# Altium PCB 1819D_Emetteur_DCF.PcbDoc
Units mm, origin at the board's own origin, x right, y up, seen from the top; angles counter-clockwise.
Board outline 44.96 x 35.05 mm, 2 copper layers (Top Layer, Bottom Layer), stack 1.586 mm thick; 35 components, 17 nets, 76 pads, 95 vias.
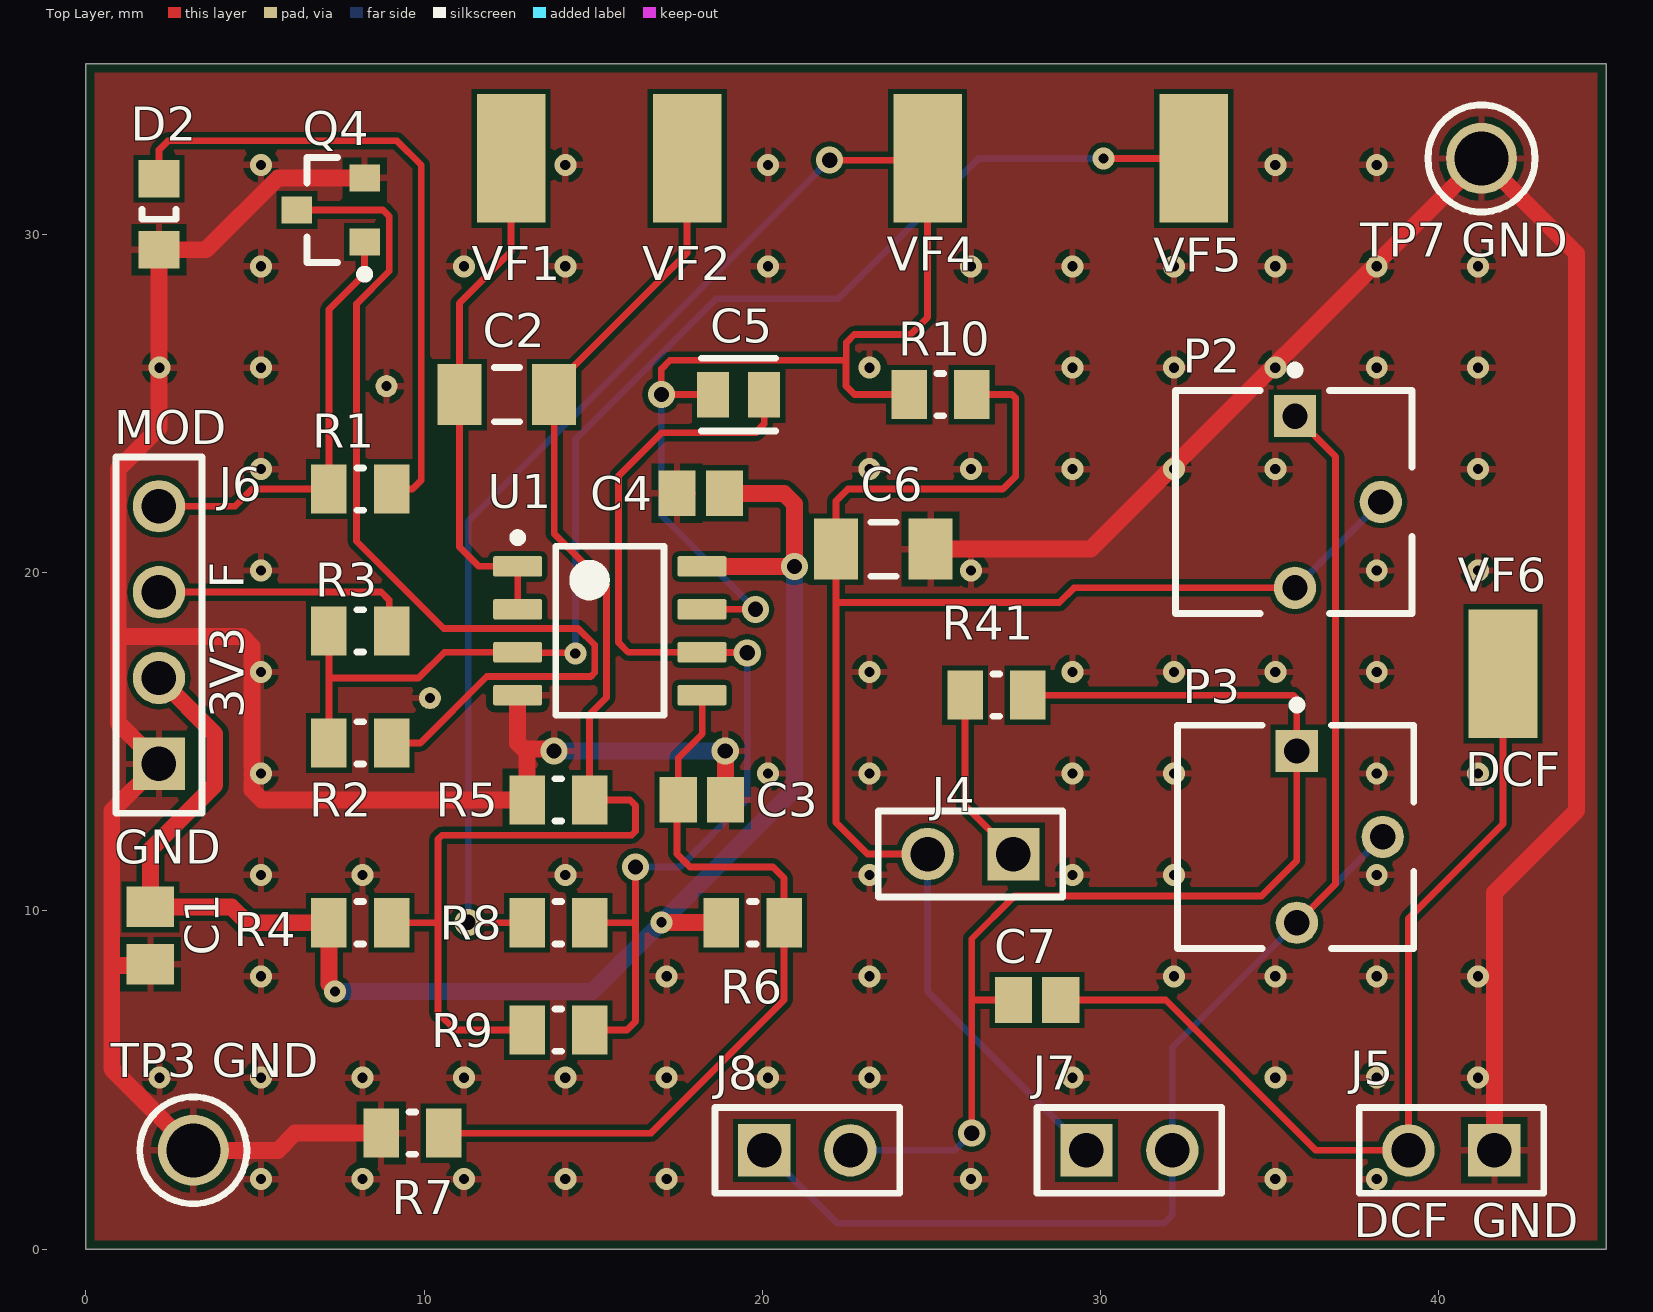
[diagram p0: Top Layer view]
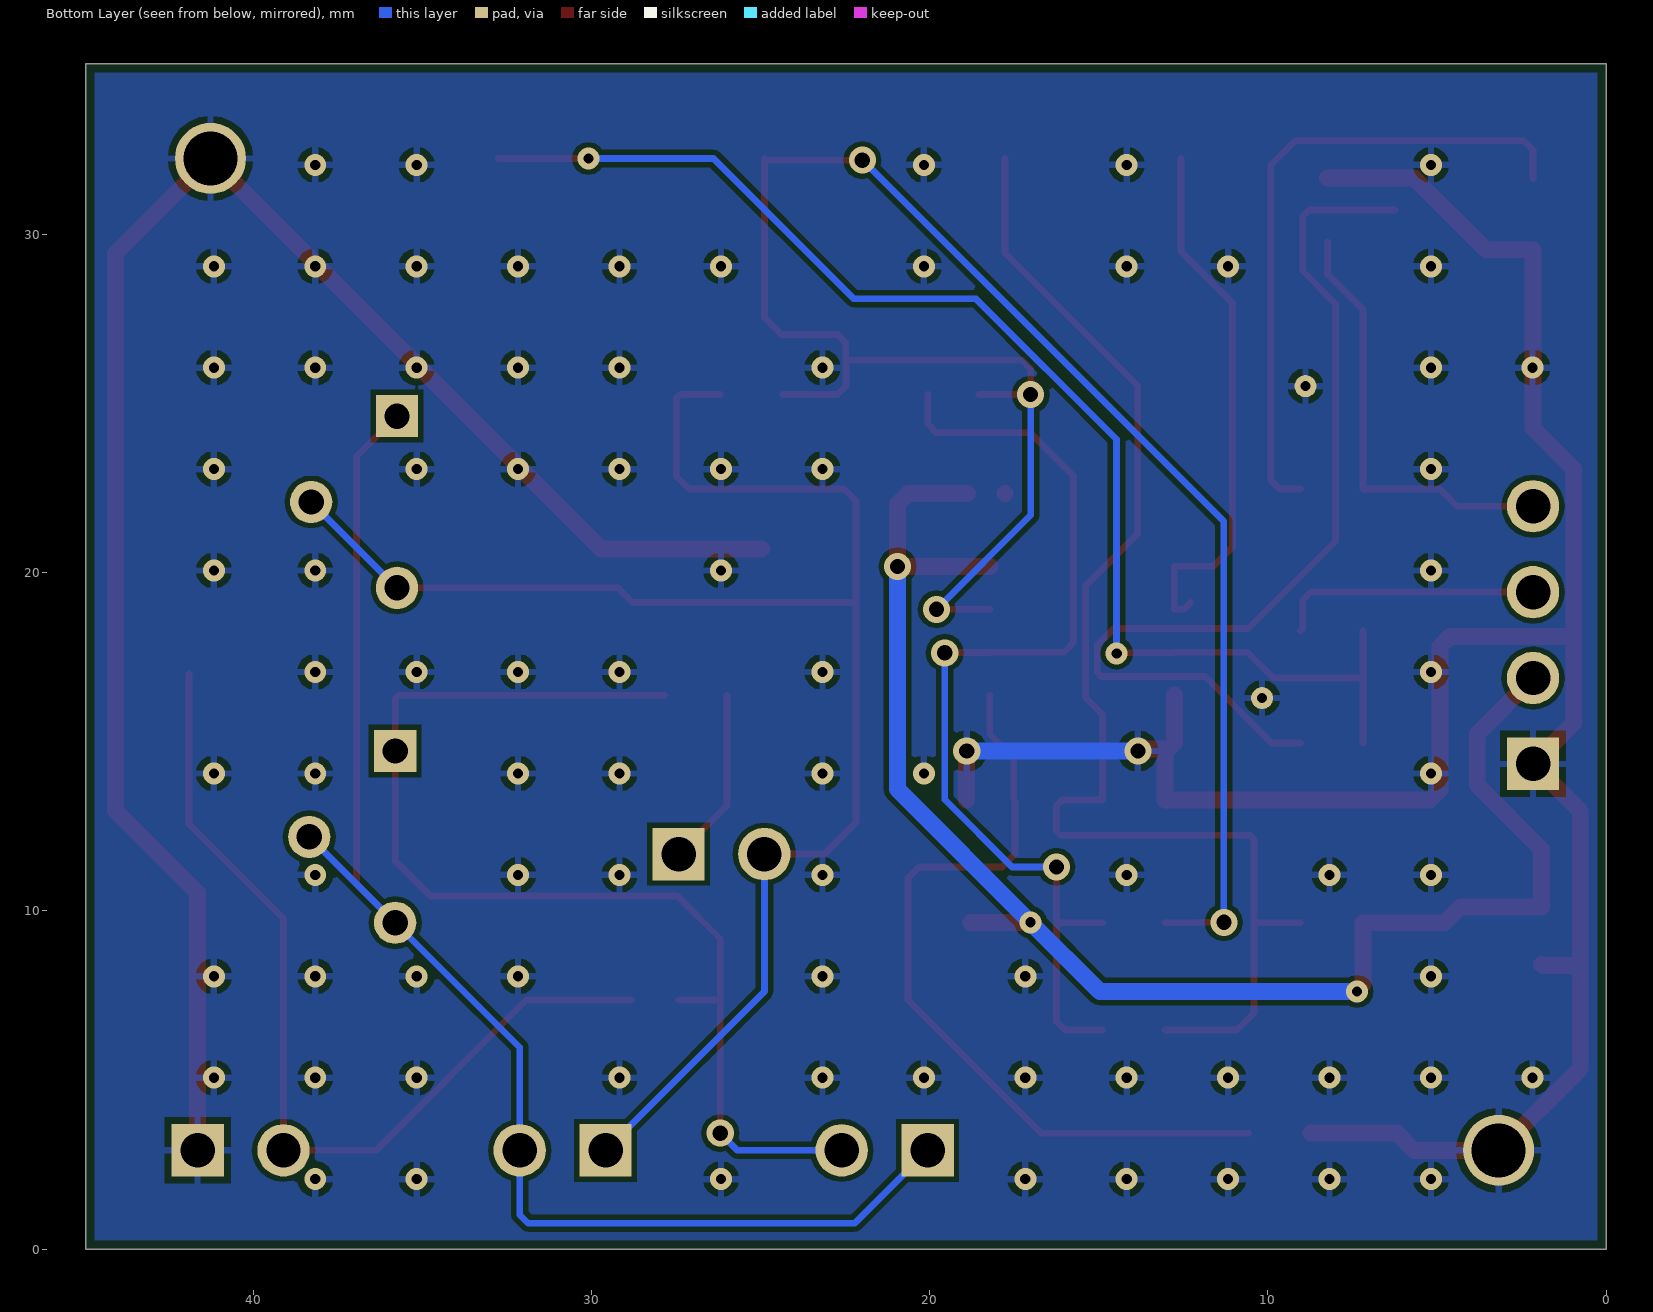
[diagram p1: Bottom Layer view, seen from below]

## Layer stack, top to bottom
Top Solder: solder mask 0.0102, Solder Resist, Dk 3.5
Top Layer: signal copper 0.018
Dielectric1: core 1.55, FR-4, Dk 4.8
Bottom Layer: signal copper 0.018
Bottom Solder: solder mask 0.0102, Solder Resist, Dk 3.5

## Board outline
0,0 44.958,0 44.958,35.052 0,35.052

## Design rules (kind name [scope] priority, off if disabled: settings)
BoardOutlineClearance [All] p1: gap=0.25 ignorepadtopadclearanceinfootprint=FALSE except(0: Arc-SplitContinuation Track-SplitContinuation SMDPad-SplitContinuation THPad-SplitContinuation Via-SplitContinuation Fill-SplitContinuation Poly-SplitContinuation Region-SplitContinuation Text-SplitContinuation)
Clearance Clearance-xPP-xTP-xTT [All] p1: gap=0.15 ignorepadtopadclearanceinfootprint=FALSE except(0: Arc-Hole Track-Hole SMDPad-Hole THPad-Hole Via-Hole Fill-Hole Poly-Hole Region-Hole Text-Hole)
ComponentClearance [All] p1: gap=0.25 collisioncheckmode=3 verticalgap=0.25 showdistances=FALSE
DiffPairsRouting [All] p1: maxlimit=0.25 minlimit=0.25 mostfreqgap=0.25 toplayer_minwidth=0.381 toplayer_maxwidth=0.381 toplayer_prefwidth=0.381 bottomlayer_minwidth=0.381 bottomlayer_maxwidth=0.381 bottomlayer_prefwidth=0.381 maxuncoupledlength=12.5
Height [All] p1: minheight=0 maxheight=25 prefheight=12.5
HoleSize HoleSize-PTH [All] p1: absolutevalues=TRUE maxlimit=10 minlimit=0.25 maxpercent=80.000 minpercent=20.000
HoleToHoleClearance [All] p1: gap=0.35 allowstackedmicrovias=TRUE
MinimumAnnularRing "Minimum IAR  >0.45mm" [((ObjectKind = 'Pad') OR (ObjectKind = 'Via')) And (Layer = 'MultiLayer') And (HoleDiameter > AsMM(0.45))] p1: minimumring=0.175 // minimum inner annular ring for pads > 0.45mm finished hole size
MinimumAnnularRing "Minimum IAR <=0.45mm" [((ObjectKind = 'Pad') OR (ObjectKind = 'Via')) And (Layer = 'MultiLayer') And (HoleDiameter <= AsMM(0.45))] p2: minimumring=0.175 // minimum inner annular ring for pads <= 0.45mm finished hole size
MinimumSolderMaskSliver [All] p1: minsoldermaskwidth=0.08
PasteMaskExpansion [All] p1: expansion=-0.025
PlaneClearance PlaneClearance-IPI [All] p1: clearance=0.25
PlaneConnect [All] p1: planeconnectstyle=Relief reliefexpansion=0.175 reliefentries=4 reliefconductorwidth=0.2 reliefairgap=0.2
PolygonConnect PolygonConnect-xTW [All] p1: connectstyle=Relief reliefconductorwidth=0.2 reliefentries=4 polygonreliefangle="90 Angle" airgapwidth=0.2
RoomDefinition 1819D_Emetteur_DCF [InComponentClass('1819D_Emetteur_DCF')] p1: confinementstyle=ConfineIn formatcopy=TRUE lockcomponents=FALSE outline -5.08,-7.62 50.8,-7.62 50.8,37.846 -5.08,37.846
RoutingCorners [All] p1: cornerstyle=45-Degree minsetback=2.5 maxsetback=2.5
RoutingVias RoutingViasES [All] p1: holewidth=0.3 width=0.65 viastyle="Through Hole" minholewidth=0.25 minwidth=0.61 maxholewidth=0.45 maxwidth=0.8 // finishet hole size <= 0.45mm
SilkToSilkClearance [All] p1: silktosilkclearance=0.2
SilkToSolderMaskClearance SilkscreenOverComponentPads [IsPad] p1: minsilkscreentomaskgap=0.2 clearancetoexposedcopper=TRUE
SolderMaskExpansion [All] p1: expansion=0 istentingtop=FALSE
UnRoutedNet [All] p1: checkbadconnections=TRUE
Width Width-xTW [All] p1: maxlimit=0.5 minlimit=0.2 preferedwidth=0.2 minimp=50.000000 maximp=50.000000 favimp=50.000000
17 further rules are at their usual default settings.

## Components (designator, comment, footprint, x,y, rotation, side; value= is the part's Value field where it differs from the comment)
C1 "10uF" CAPC2013X135X45NL10T25 1.905,9.271 r90 top
C2 "33n" FP-C1206C-EB-IPC_B 12.446,25.273 r0 top value="33,000 pF"
C3 "100nF" CAPC2013X140X50LL20T25 18.219,13.286 r180 top
C4 "100nF" CAPC2013X140X50LL20T25 18.184,22.352 r0 top
C5 "100pF" FP-C0805C-DN-MFG 19.3,25.273 r180 top value="100 pF"
C6 "33n" FP-C1206C-EB-IPC_B 23.582,20.701 r180 top value="33,000 pF"
C7 "100nF" CAPC2013X140X50LL20T25 28.132,7.366 r180 top
D2 "LGR971-KN-1" LED_0805 2.159,30.607 r90 top
J4 "TSW-102-26-L-S" SMTC-TSW-102-26-XX-S 27.432,11.684 r180 top
J5 "TSW-102-26-L-S" SMTC-TSW-102-26-XX-S 41.656,2.921 r180 top
J6 "TSW-104-08-G-S" SMTC-TSW-104-08-X-S 2.159,14.351 r90 top
J7 "TSW-102-26-L-S" SMTC-TSW-102-26-XX-S 29.591,2.921 r0 top
J8 "TSW-102-26-L-S" SMTC-TSW-102-26-XX-S 20.066,2.921 r0 top
P2 "10k" BOUR-3362P 35.722,22.098 r270 top
P3 "100k" BOUR-3362P 35.779,12.192 r270 top
Q4 "IRLML2402TRPBF" INTR-IRLML2402TRPBF-3_V 7.239,30.734 r180 top
R1 "180" RESC2013X50X30NL20T20 8.112,22.479 r0 top
R2 "10k" RESC2013X50X30NL20T20 8.112,14.969 r0 top
R3 "30k" RESC2013X50X30NL20T20 8.112,18.288 r180 top
R4 "10k" RESC2013X50X30NL20T20 8.112,9.652 r0 top
R5 "10k" RESC2013X50X30NL20T20 13.97,13.286 r180 top
R6 "10k" RESC2013X50X30NL20T20 19.721,9.652 r180 top
R7 "10k" RESC2013X50X30NL20T20 9.652,3.429 r0 top
R8 "10k" RESC2013X50X30NL20T20 13.97,9.652 r180 top
R9 "10k" RESC2013X50X30NL20T20 13.97,6.477 r0 top
R10 "47" RESC2013X50X30NL20T20 25.273,25.273 r0 top
R41 "1k" RESC2013X50X30NL20T20 26.924,16.383 r0 top
"TP3 GND" "5011" KSTN-5011_V 3.175,2.921 r90 top
"TP7 GND" "5011" KSTN-5011_V 41.275,32.258 r90 top
U1 "LM6132A" D0008A_N 15.494,18.288 r0 top
VF1 "5019" KSTN-5019_V 12.573,32.258 r90 top
VF2 "5019" KSTN-5019_V 17.78,32.258 r270 top
VF4 "5019" KSTN-5019_V 24.892,32.258 r270 top
VF5 "5019" KSTN-5019_V 32.766,32.258 r90 top
VF6 "5019" KSTN-5019_V 41.91,17.018 r90 top

## Footprints (in the part's own frame and the unit in brackets; to place one, negate y for a bottom-side part, rotate by r counter-clockwise, add the part's x,y. Pads: shape width x height; smd on the part's side, far side on the other; paste and mask are expansions set on the pad)
BOUR-3362P [mm] "THD, 3-Leads, Body 6.6x6.99mm, Pitch 2.54mm"
  rect 1.25x1.25 hole 0.75: 1(-2.54,0.035)
  round 1.25 hole 0.75: 2(0,2.575) 3(2.54,0.035)
  silkscreen extent -4.02,-3.49 3.3,3.49, body extent -3.3,-3.49 3.3,3.49, height 4.95
CAPC2013X135X45NL10T25 [mm] "Chip Capacitor, 2-Leads, Body 2.00x1.25mm, IPC Medium Density"
  rect 1.2x1.4 smd: 1(-0.85,0) 2(0.85,0)
  body extent -1.05,-0.67 1.05,0.67, height 1.35
CAPC2013X140X50LL20T25 [mm] "Chip Capacitor, 2-Leads, Body 2.00x1.25mm, IPC High Density"
  rect 1.1x1.35 smd: 1(-0.7,0) 2(0.7,0)
  body extent -1.1,-0.72 1.1,0.72, height 1.4
D0008A_N [mm] "SOIC, 8-Leads, Body 5x4mm, Pitch 1.27mm, IPC Medium Density"
  rrect17% 1.45x0.6 smd: 1(-2.725,1.905) 2(-2.725,0.635) 3(-2.725,-0.635) 4(-2.725,-1.905) 5(2.725,-1.905) 6(2.725,-0.635) 7(2.725,0.635) 8(2.725,1.905)
  silkscreen extent -2.85,-2.5 1.6,2.88, body extent -3,-2.45 3,2.45, height 1.63
FP-C0805C-DN-MFG [mm]
  rect 0.95x1.35 smd: 1(-0.75,0) 2(0.75,0)
  silkscreen extent -1.1,-1.07 1.1,1.08, body extent -1.4,-0.85 1.4,0.85, height 0.25
FP-C1206C-EB-IPC_B [mm]
  rect 1.305x1.806 smd: 1(-1.401,0) 2(1.401,0)
  silkscreen extent -0.37,-0.8 0.37,0.8, body extent -2.3,-1.15 2.3,1.15, height 0.25
INTR-IRLML2402TRPBF-3_V [mm] "SOT23, 3-Leads, Body 3.05x1.4mm, Pitch 0.95mm"
  rect 0.9x0.8 smd: 1(-1,0.95) 2(-1,-0.95) 3(1,0)
  silkscreen extent -1.13,-1.55 0.7,2.02, body extent -0.7,-1.52 0.7,1.53, height 1.11
KSTN-5011_V [mm] "Test Point, Dia 3.17mm"
  round 2.1 hole 1.6: 1(0,0)
  silkscreen extent -1.58,-1.59 1.58,1.59, body extent -1.59,-1.59 1.59,1.59, height 8.13
KSTN-5019_V [mm] "Test Point, 1-Leads, Body 3.81x2.03mm"
  rect 3.8x2.03 smd: 1(0,0)
  body extent -1.9,-1.01 1.9,1.02, height 2.29
LED_0805 [mm] "Chip LED, 2-Leads, Body 2.0x1.3mm, IPC Medium Density"
  rect 1.1x1.2 smd: 1(-1.05,0) 2(1.05,0)
  silkscreen extent -0.15,-0.5 0.15,0.5, body extent -1,-0.62 1,0.63, height 0.68
RESC2013X50X30NL20T20 [mm] "Chip Resistor, 2-Leads, Body 2.00x1.25mm, IPC Medium Density"
  rect 1.05x1.45 smd: 1(-0.925,0) 2(0.925,0)
  silkscreen extent -0.1,-0.62 0.1,0.63, body extent -1.1,-0.72 1.1,0.72, height 0.5
SMTC-TSW-102-26-XX-S [mm] ".025 SQ Post Terminal Strip Assembly, 1x2 Pins, Vertical, 2.54mm Pitch, Male"
  rect 1.55x1.55 hole 1.02: 1(0,0)
  round 1.55 hole 1.02: 2(2.54,0)
  silkscreen extent -1.46,-1.27 4,1.27, body extent -1.4,-1.27 3.81,1.27, height 8.38
SMTC-TSW-104-08-X-S [mm] ".025 SQ Post Terminal Strip Assembly, 1x4 Pins, Vertical, 2.54mm Pitch, Male"
  rect 1.55x1.55 hole 1.02: 1(0,0)
  round 1.55 hole 1.02: 2(2.54,0) 3(5.08,0) 4(7.62,0)
  silkscreen extent -1.46,-1.27 9.08,1.27, body extent -1.27,-1.27 8.89,1.27, height 8.38

## Part data
C1: library part CMP-2007-03514-1, Manufacturer=Murata, Part Number=GRM21BF51C106ZE15L
C2 C6: library part CMP-03020-013789-1, "Multilayer Ceramic Capacitor, C Series, 0.033 - F, - 10%, X7r, 50 V, 1206 [3216 Metric]", Capacitance="33,000 pF", Manufacturer=KEMET, Manufacturer Part Number=C1206C333K5RACTU, Package=C1206C-EB, Temperature="-55°C to +150°C", Temperature Characteristic=X7R, Temperature Coefficient=15%, Temperature Range High=+150°C, Temperature Range Low=-55°C, Tolerance=0.1, Voltage Rating="50 V", Automotive=Yes, Automotive Grade="Grade 0", Category=Cap, ComponentLink2Description=Datasheet, ComponentLink2URL=https://content.kemet.com/datasheets/KEM_C1007_X8R_ULTRA_150C_SMD.pdf, Device Class L1="Passive Components", Device Class L2=Capacitors, Device Class L3="Ceramic Capacitors", Digikey Description="Multilayer Ceramic Capacitor, C Series, 0.033 - F, - 10%, X7r, 50 V, 1206 [3216 Metric]", Height=0.88mm, Ipc Land Pattern Name=CAPC320160X78, Lead Free=Yes, Material=Ceramic, Mouser Description="Multilayer Ceramic Capacitor, C Series, 0.033 - F, - 10%, X7r, 50 V, 1206 [3216 Metric]", Octopart=https://octopart.com/c1206c333k5ractu-kemet-125953, RoHS=TRUE
C3 C4 C7: library part CMP-2007-04556-1, Manufacturer="AVX Interconnect / Elco", Part Number=08051A470JAT2A
C5: library part CMP-03020-013647-1, "CAP CER 100PF 50V C0G/NP0 0805", Capacitance="100 pF", Manufacturer=KEMET, Manufacturer Part Number=C0805C101J5GACTU, Package=C0805C-DN, Temperature="-55°C to +125°C", Temperature Characteristic=C0G, Temperature Coefficient=30ppm/°C, Temperature Range High=+125°C, Temperature Range Low=-55°C, Tolerance=0.05, Voltage Rating="50 V", Automotive=No, Category=Cap, ComponentLink2Description=Datasheet, ComponentLink2URL=https://content.kemet.com/datasheets/KEM_C1003_C0G_SMD.pdf, Device Class L1="Passive Components", Device Class L2=Capacitors, Device Class L3="Ceramic Capacitors", Digikey Description="CAP CER 100PF 50V C0G/NP0 0805", Height=0.88mm, Ipc Land Pattern Name=CAPC200125X78, Lead Free=Yes, Material=Ceramic, Octopart=https://octopart.com/c0805c101j5gactu-kemet-100795, RoHS=TRUE
D2: "SMD mono-color Chip LED, 0805, Green", Color=Green, Manufacturer="Wuerth Elektronik", ComponentLink1Description="Manufacturer URL", ComponentLink2Description=Datasheet, PackageReference=0805_A, PartNumber=LGR971-KN-1, Supplier="Stock ES"
J4 J5 J7 J8: library part CMP-1024-00330-1, "0.025\" SQ Post Header, Through-hole, Vertical, -55 to 125 degC, 2.54 mm Pitch, 2-Pin, Male, RoHS", Manufacturer=Samtec, Temperature Range="-55 to 125 degC", ComponentLink1Description="Manufacturer URL", ComponentLink1URL=http://www.samtec.com, ComponentLink2Description=Datasheet, ComponentLink2URL=http://www.samtec.com/documents/webfiles/pdf/TSW_TH.PDF, ComponentLink3Description="Package Specification", ComponentLink3URL=http://www.samtec.com/documents/webfiles/cpdf/TSW-XXX-XX-XXX-X-XX-XXX-MKT.pdf, DatasheetVersion=F-214, Mounting Technology=Through-hole, Orientation=Vertical, PackageDescription=".025[0.64] SQ. Post Terminal Strip Assembly", PackageReference=TSW-102-26-XX-S, PackageVersion="DM, 8/1988", PartNumber=TSW-102-26-L-S, Pitch="2.54 mm", RoHS=True
J6: library part CMP-1024-00357-1, "0.025\" SQ Post Header, Through-hole, Vertical, -55 to 125 degC, 2.54 mm Pitch, 4-Pin, Male, RoHS", Manufacturer=Samtec, Temperature Range="-55 to 125 degC", ComponentLink1Description="Manufacturer URL", ComponentLink1URL=http://www.samtec.com, ComponentLink2Description=Datasheet, ComponentLink2URL=http://www.samtec.com/documents/webfiles/pdf/TSW_TH.PDF, ComponentLink3Description="Package Specification", ComponentLink3URL=http://www.samtec.com/documents/webfiles/cpdf/TSW-XXX-XX-XXX-X-XX-XXX-MKT.pdf, DatasheetVersion=F-214, Mounting Technology=Through-hole, Orientation=Vertical, PackageDescription=".025[0.64] SQ. Post Terminal Strip Assembly", PackageReference=TSW-104-08-X-S, PackageVersion="DM, 8/1988", PartNumber=TSW-104-08-G-S, Pitch="2.54 mm", RoHS=True
P2: library part CMP-1747-00004-1, "Square Trimpot(R) Trimming Potentiometer, 10 KOhm, 300 V, -55 to 125 degC, 3-Pin THD, RoHS, Tube", Case Code (Imperial)=0612, Case Code (Metric)=1632, Case/Package=1206, Max Operating Temperature=125degC, Min Operating Temperature=-25degC, Package Quantity=5000, Power Rating="1 W", Resistance="50 mohm", Tolerance=1%, Voltage Rating="220 mV", ComponentLink1Description="Manufacturer URL", ComponentLink1URL=http://www.bourns.com/, ComponentLink2Description=Datasheet, ComponentLink2URL=http://www.bourns.com/docs/Product-Datasheets/3362.pdf, DatasheetVersion=May-16, Height="0.6 mm", Length="3.2 mm", Mount="Surface Mount", PackageDescription="3-Pin Through Hole Device, Body 6.6 x 6.99 mm, Pitch 2.54 mm", PackageReference=3326P, Packaging="Tape and Reel", Pins=2, REACH SVHC="No SVHC", RoHSCompliant=True, Width="1.6 mm"
P3: library part CMP-1747-00003-1, "Square Trimpot(R) Trimming Potentiometer, 100 KOhm, 300 V, -55 to 125 degC, 3-Pin THD, RoHS, Tube", Case\Package=Axial, Max Operating Temperature="155 degC", Min Operating Temperature="-55 degC", Package Quantity=200, Power Rating="250 mW", Resistance="1 mohm", Tolerance=1%, Voltage Rating="250 V", ComponentLink1Description="Manufacturer URL", ComponentLink1URL=http://www.bourns.com/, ComponentLink2Description=Datasheet, ComponentLink2URL=http://www.bourns.com/docs/Product-Datasheets/3362.pdf, DatasheetVersion=May-16, Length="0.248 inch", Mount="Through Hole", PackageDescription="3-Pin Through Hole Device, Body 6.6 x 6.99 mm, Pitch 2.54 mm", PackageReference=3326P, Packaging=Bulk, RoHSCompliant=true
Q4: library part CMP-2000-05155-1, "HEXFET(R) Power MOSFET, N-Channel, 20 V, 1.2 A, 3-Pin SOT-23, RoHS, Tape and Reel", Continuous Drain Current Id=1.2A, Current Temperature=25degC, Drain Source Voltage Vds=20V, Junction Temperature Tj Min=-55degC, Manufacturer="International Rectifier", On Resistance Rds(on)=250mohm, Operating Temperature Range=-55degCto+150degC, Package / Case=SOT-23, Power Dissipation Pd=540mW, Pulse Current Idm=7.4A, Rds(on) Test Voltage Vgs=4.5V, Threshold Voltage Vgs Typ=700mV, Current Id Max=1.2A, Datasheet URL=https://datasheet.ciiva.com/29326/162826-da-01-en-irlml-2402tr-29326791.pdf, Datasheet Version=Jan-03, External Depth=2.5mm, External Length / Height=1.12mm, External Width=3.05mm, Full Power Rating Temperature=25degC, Manufacturer URL=http://internationalrectifier.com/, No. of Pins=3, No. of Transistors=1, Reel Quantity=3000, SMD Marking=1A, SVHC=NoSVHC(19-Dec-2012), Tape Width=8mm, Termination Type=SMD, Transistor Case Style=SOT-23, Transistor Polarity=NChannel, Voltage Vds Typ=20V, Voltage Vgs Max=700mV, Voltage Vgs Rds on Measurement=4.5V, Voltage Vgs th Min=700mV
R1 R2 R3 R4 R5 R6 R7 R8 R9 R10 R41: library part Resistance
"TP3 GND" "TP7 GND": library part CMP-1672-00003-4, "Test Point, Black, Through Hole, RoHS, Bulk", Colour=Black, Manufacturer=Keystone, Package Quantity=100, ComponentLink1Description="Manufacturer URL", ComponentLink1URL=http://www.keyelco.com/, ComponentLink2Description=Datasheet, ComponentLink2URL=http://www.keyelco.com/product-pdf.cfm?p=1320, Contact Material=Bronze, Contact Plating=Silver, DatasheetVersion="Rev. F, 12/2013", Height="8.12 mm", Mount="Through Hole", Mounting Technology="Through Hole", PackageDescription="1-Pin Through Hole Device, Dia 3.17 mm", PackageReference=5011, Packaging=Bulk, Pins=1, REACH SVHC="No SVHC", RoHSCompliant=true
U1: library part CMP-0055-00786-3, "Dual Low Power 10 MHz Rail-to-Rail I/O Operational Amplifier, 8-pin Narrow SOIC, Pb-Free", Manufacturer="Texas Instruments", Package Reference=D0008A, PackageTopMarking=NSZXTT*LM61*32AIM, PowerWise=N, Code_IPC=SOIC127P600-8, Code_JEDEC=MS-012-AA, ComponentLink1Description="Datasheet URL", ComponentLink1URL=http://www.ti.com/general/docs/lit/getliterature.tsp?genericPartNumber=LM6132&fileType=pdf, CompType=Amplifiers, PackageDescription="SOIC Narrow, 4.9 x 3.9 x 1.45mm, 8 Lead, 1.27mm Pitch", PinCount=8, RoHS=Y
VF1 VF2 VF4 VF5 VF6: library part CMP-1672-00008-1, "Test Point, 1 Position SMD, RoHS, Tape and Reel", Package Quantity=1000, ComponentLink1Description="Manufacturer URL", ComponentLink1URL=http://www.keyelco.com/, ComponentLink2Description=Datasheet, ComponentLink2URL=http://www.keyelco.com/product-pdf.cfm?p=1357, Contact Plating=Silver, DatasheetVersion=03/2014, Mount="Surface Mount", Mounting Technology="Surface Mount", PackageDescription="1-Pin Surface Mount Device, Body 3.81 x 2.03 mm", PackageReference=5019, Packaging="Tape and Reel", Pins=1, RoHSCompliant=True

## Free pads (board coordinates)
  round 0.65 hole 0.3: 3(8.889,25.524) 3(10.173,16.297)

## Via types
v1: diameter 0.65, hole 0.3, Top Layer to Bottom Layer, 85 vias
v2: diameter 0.8, hole 0.45, Top Layer to Bottom Layer, 10 vias

## Nets (pads, with @x,y where several pads share a name; then routed paths per layer and width w, separated by ;. In a path a pad name is that pad's centre, name@x,y a point inside that pad or via, vN(x,y) a via of type N, cw(c..) or ccw(c..) an arc to the next point about the centre after c; other vN are vias at no path point)
3.3V: C1.2 C4.2 J6.2 R4.1 R6.2 U1.8 | length 47.1
  Top Layer w0.5: J6.2 3.81,15.24 3.81,13.728 1.905,11.823 C1.2 4.305,10.121 4.774,9.652 R4.1 7.187,7.84 7.366,7.661 v1(7.366,7.62) ; v1(17.018,9.665) 17.025,9.659 18.789,9.659 R6.2 ; U1.8 v2(20.955,20.193) 20.955,22.043 20.646,22.352 C4.2
  Bottom Layer w0.5: v1(7.366,7.62) 14.973,7.62 v1(17.018,9.665) 20.955,13.602 v2(20.955,20.193)
GND: "TP3 GND.1" "TP7 GND.1" C1.1 C3.1 C4.1 C6.1 D2.1 J5.1 J6.1 pad.3 Q4.2 R5.2 R7.1 U1.4 | length 122.8
  Top Layer w0.5: 1.018,18.118 4.622,18.118 4.914,17.825 4.914,13.579 5.207,13.286 R5.2 13.045,14.693 12.949,14.789 ; C1.1 1.866,8.382 0.762,8.382 ; Q4.2 5.674,31.684 3.547,29.557 D2.1 2.159,24.282 0.955,23.078 0.955,18.118 0.955,15.555 J6.1 0.762,12.954 0.762,8.382 ; R7.1 6.184,3.429 5.676,2.921 3.175,2.921 0.762,5.334 0.762,8.382 ; U1.4 12.769,14.969 12.949,14.789 ; v2(13.847,14.732) 13.789,14.789 12.949,14.789 ; v2(18.908,14.732) 18.914,14.726 18.914,13.291 C3.1 ; C6.1 29.718,20.701 41.275,32.258 44.081,29.452 44.081,12.966 41.656,10.541 J5.1
  Bottom Layer w0.5: v2(13.847,14.732) v2(18.908,14.732)
  other v1: 5.177,2.069 8.177,2.069 11.177,2.069 14.177,2.069 17.177,2.069 26.177,2.069 35.177,2.069 38.177,2.069 2.177,5.069 5.177,5.069 8.177,5.069 11.177,5.069 14.177,5.069 17.177,5.069 20.177,5.069 23.177,5.069 29.177,5.069 35.177,5.069 38.177,5.069 41.177,5.069 5.177,8.069 17.177,8.069 23.177,8.069 32.177,8.069 35.177,8.069 38.177,8.069 41.177,8.069 5.177,11.069 8.177,11.069 14.177,11.069 23.177,11.069 29.177,11.069 32.177,11.069 38.177,11.069 5.177,14.069 20.177,14.069 23.177,14.069 29.177,14.069 32.177,14.069 38.177,14.069 41.177,14.069 5.177,17.069 23.177,17.069 29.177,17.069 32.177,17.069 35.177,17.069 38.177,17.069 5.177,20.069 26.177,20.069 38.177,20.069 41.177,20.069 5.177,23.069 23.177,23.069 26.177,23.069 29.177,23.069 32.177,23.069 35.177,23.069 41.177,23.069 2.177,26.069 5.177,26.069 23.177,26.069 29.177,26.069 32.177,26.069 35.177,26.069 38.177,26.069 41.177,26.069 5.177,29.069 11.177,29.069 14.177,29.069 20.177,29.069 26.177,29.069 29.177,29.069 32.177,29.069 35.177,29.069 38.177,29.069 41.177,29.069 5.177,32.069 14.177,32.069 20.177,32.069 35.177,32.069 38.177,32.069
NetC2_1: C2.1 U1.1 U1.2 VF1.1 | length 15.9
  Top Layer w0.2: U1.2@12.286,19.123 12.486,18.923 U1.2 U1.1 11.62,20.193 11.045,20.768 C2.1 11.045,27.978 12.573,29.505 VF1.1
NetC2_2: C2.2 R4.2 R5.1 R9.1 VF2.1 | length 38.9
  Top Layer w0.2: R4.2 10.414,9.652 ; R9.1 10.922,6.477 10.414,6.985 10.414,9.652 ; VF2.1 17.78,29.457 13.847,25.524 13.847,21.169 15.398,19.618 15.398,16.316 14.895,15.813 R5.1 16.087,13.286 16.256,13.117 16.256,12.358 16.139,12.241 10.531,12.241 10.414,12.124 10.414,9.652
NetC3_2: C3.2 R6.1 R7.2 U1.5 | length 23.8
  Top Layer w0.2: R7.2 16.709,3.429 20.646,7.366 R6.1 20.646,10.977 20.32,11.303 17.865,11.303 17.484,11.684 17.484,13.251 C3.2 17.519,14.532 18.227,15.24 18.227,16.375 U1.5
NetC5_1: C5.1 R8.1 R9.2 U1.6 | length 30.6
  Top Layer w0.2: R9.2 16.002,6.477 16.256,6.731 16.256,9.652 ; R8.1 16.256,9.652 ; v2(16.256,11.303) 16.256,9.652 ; v2(19.558,17.637) 19.55,17.645 18.227,17.645 U1.6 16.037,17.653 15.748,17.942 15.748,22.865 17.025,24.142 19.801,24.142 20.058,24.4 20.058,25.265 C5.1
  Bottom Layer w0.2: v2(16.256,11.303) 17.567,11.303 19.558,13.294 v2(19.558,17.637)
NetC5_2: C5.2 R8.2 R10.1 U1.7 VF4.1 | length 59.3
  Top Layer w0.2: v2(11.303,9.665) 12.052,9.665 12.065,9.652 R8.2 ; U1.7 v2(19.801,18.923) ; C5.2 v2(17.018,25.273) 17.018,26.035 17.272,26.289 22.489,26.289 ; v2(21.996,32.207) 24.841,32.207 VF4.1 24.892,27.559 24.384,27.051 22.723,27.051 22.489,26.817 22.489,26.289 ; R10.1 22.73,25.273 22.479,25.524 22.479,26.279 22.489,26.289
  Bottom Layer w0.2: v2(11.303,9.665) 11.303,21.515 v2(21.996,32.207) ; v2(17.018,25.273) 17.018,21.706 v2(19.801,18.923)
NetC6_2: C6.2 J4.2 J7.1 P2.2 P2.3 R10.2 | length 49.9
  Top Layer w0.2: J4.2 23.114,11.684 22.181,12.617 22.181,19.123 ; R10.2 27.384,25.273 27.501,25.156 27.501,22.862 27.118,22.479 22.533,22.479 22.181,22.128 C6.2 22.181,19.123 ; P2.3 29.22,19.558 28.785,19.123 22.181,19.123
  Bottom Layer w0.2: J4.2 24.892,7.62 28.916,3.596 J7.1 ; P2.3 P2.2
NetC7_1: C7.1 J5.2 VF6.1 | length 27.4
  Top Layer w0.2: C7.1 31.937,7.366 36.382,2.921 J5.2 39.116,9.779 41.91,12.573 VF6.1
NetC7_2: C7.2 J8.2 P3.1 R41.2 | length 34.2
  Top Layer w0.2: v2(26.198,3.429) 26.198,7.366 ; C7.2 26.198,7.366 ; R41.2 35.697,16.383 35.814,16.266 P3.1 35.814,11.488 34.769,10.443 27.461,10.443 26.198,9.18 26.198,7.366
  Bottom Layer w0.2: J8.2 25.69,2.921 v2(26.198,3.429)
NetD2_2: D2.2 R1.2 | length 19.3
  Top Layer w0.2: D2.2 2.159,32.512 2.425,32.778 9.196,32.778 9.918,32.056 9.918,22.745 9.652,22.479 R1.2
NetJ4_1: J4.1 R41.1 | length 5.3
  Top Layer w0.2: R41.1 25.999,13.117 J4.1
NetJ6_3: J6.3 R3.1 | length 7.8
  Top Layer w0.2: J6.3 8.732,19.431 8.968,19.196 8.968,18.357 R3.1
NetJ6_4: J6.4 Q4.1 R1.1 | length 13
  Top Layer w0.2: J6.4 4.406,21.971 4.914,22.479 R1.1 7.187,27.788 8.239,28.84 Q4.1
NetJ7_2: J7.2 J8.1 P2.1 P3.2 P3.3 | length 42.8
  Top Layer w0.2: P2.1 36.957,23.438 36.957,10.795 P3.3
  Bottom Layer w0.2: J8.1 22.225,0.762 31.877,0.762 32.131,1.016 J7.2 32.131,5.969 P3.3 35.814,9.665 38.341,12.192 P3.2
NetQ4_3: Q4.3 R2.2 | length 28.8
  Top Layer w0.2: Q4.3 8.785,30.734 8.968,30.551 8.968,28.922 8.004,27.958 8.004,20.937 10.583,18.357 14.555,18.357 15.048,17.864 15.048,17.05 14.931,16.933 11.853,16.933 9.889,14.969 R2.2
NetR2_1: R2.1 R3.2 U1.3 VF5.1 | length 39
  Top Layer w0.2: R2.1 7.187,16.891 ; R3.2 7.187,16.891 ; v1(14.473,17.621) 14.457,17.637 12.785,17.637 U1.3 10.599,17.653 9.837,16.891 7.187,16.891 ; v1(30.099,32.258) VF5.1
  Bottom Layer w0.2: v1(14.473,17.621) 14.478,17.626 14.478,23.953 18.63,28.106 22.246,28.106 26.398,32.258 v1(30.099,32.258)

## Polygon pours and split planes (outlines as drawn)
GND on Top Layer "GND_L01_P001" (solid, remove dead copper, pour order 1): 0,35.052 44.958,35.052 44.958,0 0,0
GND on Bottom Layer "GND_L02_P002" (solid, remove dead copper, pour order 2): -0.127,34.926 44.831,34.926 44.831,-0.126 -0.127,-0.126

## Silkscreen, mask and mechanical layers (free items; w line width, h text height)
Top Overlay:
  text "MOD" at 0.832,23.798 h1
  text "F" at 4.66,19.531 h1 r90
  text "3V3" at 4.66,15.694 h1 r90
  text "DCF" at 40.796,13.689 h1
  text "GND" at 0.832,11.403 h1
  text "DCF" at 37.494,0.354 h1
  text "GND" at 40.994,0.354 h1
Board Outline (ES):
  lines w0.2: 35,0 35.052,0 ; 0,0 0,35.052 44.958,35.052 44.958,0 0,0